# EAGLE board mhd_1 (EAGLE 5.10)
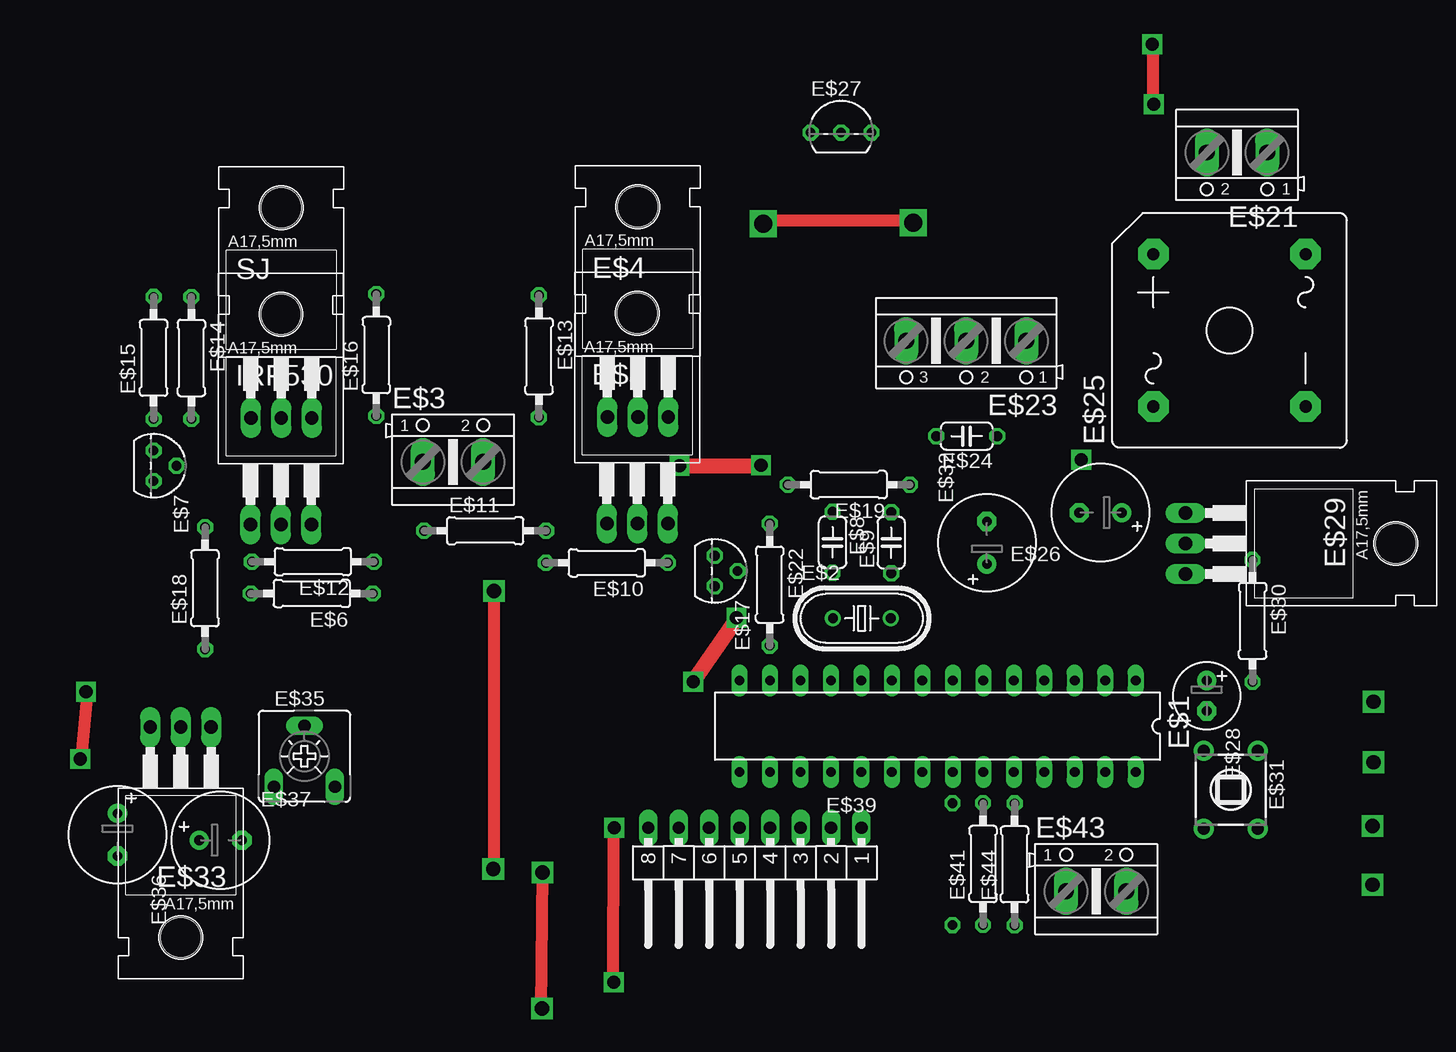
[diagram p0: board, top side]
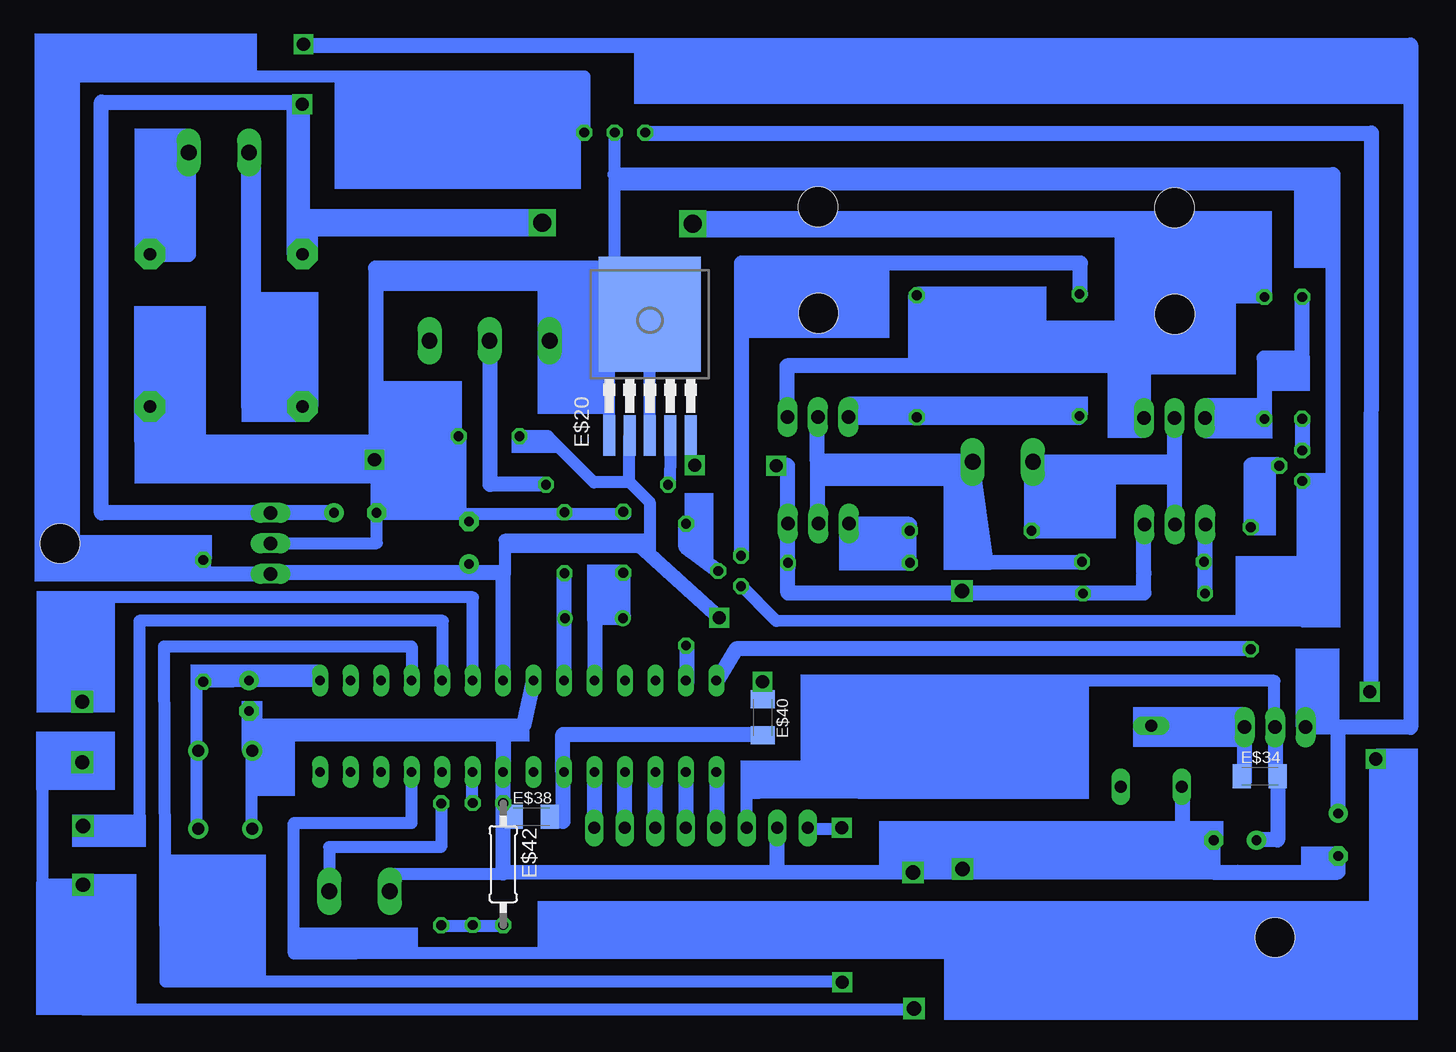
[diagram p1: board, bottom side, seen from below]

No outline drawn. Coordinates in mm, seen from the top.
Copper layers (1*16): Top 0.035mm / dielectric 1.5mm / Bottom 0.035mm
Design rules "default": minimum track width 10mil, minimum drill 24mil, track to track 8mil, track to pad 8mil, pad to pad 8mil, via to via 8mil, smd to smd 8mil, copper to edge 40mil, drill to drill 8mil, minimum pad ring 10mil, minimum via ring 8mil, stop-mask expansion 4mil, vias tented up to drill 0mil, thermal gap 10mil

## Footprints (pad centres in the part's own frame; a part is rotated, then mirrored left to right if it is on the bottom)
DIL28-3 = drill 0.813 long: 1 -16.51,-3.81; 2 -13.97,-3.81; 3 -11.43,-3.81; 4 -8.89,-3.81; 5 -6.35,-3.81; 6 -3.81,-3.81; 7 -1.27,-3.81; 8 1.27,-3.81; 9 3.81,-3.81; 10 6.35,-3.81; 11 8.89,-3.81; 12 11.43,-3.81; 13 13.97,-3.81; 14 16.51,-3.81; 15 16.51,3.81; 16 13.97,3.81; 17 11.43,3.81; 18 8.89,3.81; 19 6.35,3.81; 20 3.81,3.81; 21 1.27,3.81; 22 -1.27,3.81; 23 -3.81,3.81; 24 -6.35,3.81; 25 -8.89,3.81; 26 -11.43,3.81; 27 -13.97,3.81; 28 -16.51,3.81
HC49U70 = drill 0.813 round: 1 -2.413,0; 2 2.413,0
AK500/2 = drill 1.321 long: 1 -2.515,0; 2 2.515,0
TO220 = drill 1.118 long: 1 -2.54,-6.35; 2 0,-6.35; 3 2.54,-6.35 | hole 3.302: 0,11.176
0207/10 = drill 0.813 octagon: 1 -5.08,0; 2 5.08,0
TO92 = drill 0.813 octagon: 1 -1.27,0; 2 0,1.905; 3 1.27,0
C050-024X044 = drill 0.813 octagon: 1 -2.54,0; 2 2.54,0
TO263-51 = smd 1 x 3.4: 1 -3.4,-6.6; 2 -1.7,-6.6; 3 0,-6.6; 4 1.7,-6.6; 5 3.4,-6.6 | smd 8.5 x 9.6: 6 0,3.5
AK500/3 = drill 1.321 long: 1 -5.004,0; 2 0,0; 3 5.004,0
GBPC8 = drill 1.016 pad 2.54 octagon: + 6.35,6.35; - -6.35,-6.35; AC1 -6.35,6.35; AC2 6.35,-6.35
E3,5-8 = drill 0.813 pad 1.6 round: + -1.778,0 | drill 0.813 pad 1.6 octagon: - 1.778,0
TO92- = drill 0.813 octagon: 1 -2.54,0; 2 0,0; 3 2.54,0
E2,5-6 = drill 0.813 pad 1.6 round: + -1.27,0 | drill 0.813 pad 1.6 octagon: - 1.27,0
TL1105T = drill 1 pad 1.676 round: 1 -2.25,3.25; 2 2.25,3.25; 3 -2.25,-3.25; 4 2.25,-3.25
C1206K = smd 1.5 x 2: 1 -1.5,0; 2 1.5,0
CA6V = drill 1.016 long: A -2.54,-2.54; E 2.54,-2.54; S 0,2.54
MA08-1W = drill 1.016 long: 1 -8.89,0; 2 -6.35,0; 3 -3.81,0; 4 -1.27,0; 5 1.27,0; 6 3.81,0; 7 6.35,0; 8 8.89,0

## Placement (x,y rotation side)
E$1  [DIL28-3]  68.35,21.35 180 top
E$2  [HC49U70]  62.04,30.34 0 top
E$3  [AK500/2]  27.97,43.38 0 top
E$4  [TO220]  43.37,53.47 0 top
E$5  [TO220]  43.33,44.59 0 top
E$6  10k  [0207/10]  16.2,32.41 180 top
E$7  [TO92]  3.02,43.06 270 top
E$8  [C050-024X044]  59.6,36.68 270 top
E$9  [C050-024X044]  64.49,36.64 90 top
E$10  10k  [0207/10]  40.79,34.97 180 top
E$11  1k  [0207/10]  30.65,37.64 0 top
E$12  1k  [0207/10]  16.29,35.06 180 top
E$13  10k  [0207/10]  35.13,52.18 270 top
E$14  10k  [0207/10]  6.17,52.04 270 top
E$15  1k  [0207/10]  3.02,52.05 90 top
E$16  1k  [0207/10]  21.58,52.28 90 top
E$17  [TO92]  49.78,34.29 270 top
E$18  1k  [0207/10]  7.31,32.85 90 top
E$19  1k  [0207/10]  60.95,41.48 180 top
E$20  [TO263-51]  57.37,52.18 0 bottom
E$21  [AK500/2]  93.3,69.16 180 top
E$22  1k  [0207/10]  54.36,33.15 270 top
E$23  [AK500/3]  70.74,53.47 180 top
E$24  [C050-024X044]  70.78,45.52 180 top
E$25  [GBPC8]  92.68,54.34 90 top
E$26  [E3,5-8]  81.93,39.15 180 top
E$27  [TO92-]  60.31,70.82 0 top
E$28  [E2,5-6]  90.78,23.89 270 top
E$29  7805  [TO220]  95.36,36.58 270 top
E$30  10k  [0207/10]  94.6,30.13 270 top
E$31  [TL1105T]  92.78,16.06 180 top
E$32  [E3,5-8]  72.46,36.64 90 top
E$33  7805  [TO220]  5.28,14.92 180 top
E$34  [C1206K]  6.55,17.17 0 bottom
E$35  [CA6V]  15.59,18.85 0 top
E$36  [E3,5-8]  0.01,12.31 270 top
E$37  [E3,5-8]  8.61,11.85 0 top
E$38  [C1206K]  67.24,13.79 0 bottom
E$39  [MA08-1W]  53.12,12.88 180 top
E$40  [C1206K]  47.96,22.09 270 bottom
E$41  1k  [0207/10]  72.14,9.87 90 top
E$42  1k  [0207/10]  69.6,9.86 270 bottom
E$43  [AK500/2]  81.57,7.59 0 top
E$44  1k  [0207/10]  74.77,9.84 90 top
IRF530  [TO220]  13.63,44.51 0 top
SJ  [TO220]  13.66,53.38 0 top

## Library data of the parts
E$1 = atmel
E$2 = crystal
E$3 E$21 E$23 E$43 = con-ptr500
E$4 E$5 IRF530 SJ = ref-packages
E$6 E$10-E$16 E$18 E$19 E$22 E$29 E$30 E$33 E$41 E$42 E$44 = ref-packages-longpad
E$7 E$17 = linear
E$8 E$9 E$24 E$26 E$28 E$32 E$36 E$37 = rcl
E$20 = micro-siemens
E$25 = rectifier
E$27 = maxim
E$31 = switch
E$34 E$38 E$40 = resistor
E$35 = pot
E$39 = con-lstb

## Tracks (layer width: path | path; a pad name or v marks a point on that pad's centre or on a via)
S$1
  Bottom 1.27: 13.66,37.96 13.66,47
S$2
  Bottom 1.27: 43.42,43.42 43.42,47.12 | 30.49,43.42 43.42,43.42 | 43.42,43.42 43.42,37.93
S$3
  Bottom 1.27: 25.67,43.36 13.78,43.36 13.78,43.39
S$4
  Bottom 1.27: 16.23,38.15 16.21,38.15 16.21,34.14
S$5
  Bottom 1.27: 11.11,32.66 11.11,38.16
S$6
  Bottom 1.27: 45.88,34.62 45.88,38.13
S$7
  Bottom 1.27: 40.77,38.18 35.76,38.18 35.76,35.01
S$8
  Bottom 1.27: 16.21,34.06 16.21,32.44 45.89,32.44 45.89,35.05
S$9
  Bottom 1.27: 16.22,46.97 16.22,51.39 45.96,51.39 45.96,46.97
S$10
  Bottom 1.27: 25.54,37.63 25.55,43.17
S$11
  Bottom 1.27: 30.52,43.29 29.34,35.03 21.46,34.99
S$12
  Bottom 1.27: 3.05,46.99 3.02,46.99 3.02,44.39
S$13
  Bottom 1.27: 21.6,47.06 40.76,47.07
S$14
  Bottom 1.27: 11.07,47 6.19,47 6.19,52.02 3.03,52.02 3.03,57.19
S$15
  Bottom 1.27: 6.19,57.17 16.21,57.17 16.21,50.77
S$16
  Bottom 1.27: 35.21,57.3 35.21,51.54 35.3,51.54
S$17
  Bottom 1.27: 4.99,43.12 7.29,43.12 7.29,38.24
S$18
  Bottom 1.27: 21.5,57.39 21.5,59.94 49.76,59.94 49.76,35.65
S$19
  Bottom 1.27: 51.65,34.23 54.37,36.27 54.37,38.28
S$20
  Bottom 1.016: 3.03,41.73 3.03,30.1 46.83,30.12 49.83,33.17
S$21
  Bottom 1.27: 16.17,55.23 16.17,62.7 54.25,62.7
S$22  (via drill 1.1)
  Top 1.27: v46.85,43.05 53.62,43.04
S$23  (via drill 1.1)
  other vias: 53.64,43.11 80.32,43.56
S$24
  Bottom 1.016: 57.37,45.57 57.37,51.86 | 60.77,45.3 60.77,51.59
S$25
  Bottom 1.016: 55.69,41.43 55.66,44.3
S$26
  Bottom 1.27: 66.13,41.5 70.7,41.5 70.7,53.46
S$27
  Bottom 1.27: 65.76,53.43 59.22,53.43 59.22,53.41
S$28
  Bottom 1.016: 59.12,45.46 59.12,41.68 62.04,41.68 65.89,45.53 68.26,45.53
S$29  (via drill 1.5)
  other vias: 53.81,63.23
S$30  (via drill 1.5)
  other vias: 66.34,63.32
S$31
  Bottom 1.016: 60.31,70.85 60.34,70.85 60.34,58.19
S$32
  Bottom 1.27: 66.32,63.21 86.32,63.21 86.32,60.15
S$33
  Bottom 1.27: 86.28,47.91 90.79,47.91 90.79,70.3
S$34
  Bottom 1.27: 99.02,60.67 95.82,60.67 95.82,70.3
S$35
  Bottom 1.27: 60.23,59.52 80.23,59.52 80.23,43.48 99.08,43.48 99.08,47.91
S$36
  Bottom 1.27: 60.29,67.32 0.46,67.32 0.46,41.81 3.06,41.81
S$37
  Bottom 1.27: 54.32,28.04 54.32,24.95
S$38
  Bottom 1.27: 7.3,27.8 50.2,27.8 51.82,25.1
S$39
  Bottom 1.27: 59.61,30.39 61.96,30.39 61.96,25.23
S$40
  Bottom 1.27: 64.54,34.02 64.55,30.36 64.55,24.9
S$41
  Bottom 1.27: 59.58,30.51 59.61,34.08
S$42
  Bottom 1.016: 59.42,39.02 80.14,39.02 | 80.14,39.02 80.14,39.24 80.14,43.6 | 88.1,36.61 80.14,36.61 80.14,39.02
S$43
  Bottom 1.27: 45.91,38.17 45.91,43.09 46.88,43.09
S$44
  Bottom 1.27: 67.08,25.14 67.95,21.34 69.61,21.35 69.61,17.53
S$45
  Bottom 1.27: 83.65,39.14 103.09,39.14 103.09,73.35 86.35,73.35 86.35,63.25 78.52,63.25
S$46
  Bottom 1.016: 84.87,25.1 94.58,25.1
S$47
  Bottom 1.016: 90.82,22.62 90.82,21.51 69.24,21.51
S$48
  Bottom 1.27: 87.99,34.03 94.55,34.03 94.55,35.17
S$49
  Bottom 1.27: 69.59,25.03 69.59,34.12 89.19,34.12
S$50
  Bottom 1.016: 73.33,45.59 80.18,45.59
S$51
  Bottom 1.016: 59.19,41.8 57.41,40.02 57.41,36.87 69.48,36.87 69.48,33.99
S$52
  Bottom 1.016: 62.82,70.82 62.82,75.49 105.39,75.49 105.39,35.24 94.49,35.24
S$53  (via drill 1.1)
  other vias: 86.36,73.18
S$54  (via drill 1.1)
  other vias: 86.24,78.18
S$55
  Bottom 1.27: 86.34,78.1 -6.01,78.1 -6.01,21.25 0,21.25 | 0,14.07 0,21.25 | 0,21.25 2.76,21.25
S$56
  Bottom 1.27: 57.75,70.77 -2.74,70.77 -2.68,24.34
S$57
  Bottom 1.27: 5.25,21.36 5.25,16.84 5.22,16.84 | 7.84,21.3 7.84,16.78
S$58
  Bottom 1.27: 7.87,21.4 15.66,21.43
S$59
  Bottom 1.27: 13.02,16.57 13.02,11.79 10.33,11.79
S$60
  Bottom 1.27: 5.07,17.26 5.07,11.89 6.96,11.89
S$61
  Bottom 1.27: 10.47,11.86 10.47,9.2 0.03,9.2 0.03,10.5
S$62
  Bottom 1.27: 69.6,17.43 69.6,9.14 8.41,9.18
S$63
  Bottom 1.27: 64.62,17.53 64.62,13.42 65.68,13.42
S$64  (via drill 1.1)
  other vias: 51.59,30.38
S$65  (via drill 1.1)
  other vias: 48,25.06
S$66
  Top 1.27: 48,25.1 51.67,30.41
S$67
  Bottom 1.27: 51.59,30.41 58.66,36.76
S$68
  Bottom 1.27: 64.62,17.5 64.62,20.67 47.74,20.67
S$69
  Bottom 1.27: 62.02,17.54 62.02,12.72
S$70
  Bottom 1.27: 59.5,17.54 59.5,12.92 | 56.96,17.42 56.96,12.8 | 54.41,17.64 54.41,13.02 | 51.8,17.48 51.8,12.86
S$71
  Bottom 1.27: 46.81,12.86 46.81,9.3 46.84,9.3
S$72
  Bottom 1.016: 48.34,15.8 49.32,15.8 49.32,12.7
S$73  (via drill 1.1)
  other vias: -2.61,24.22
S$74  (via drill 1.1)
  other vias: -3.1,18.62
S$75
  Bottom 1.016: -3.08,18.6 -3.08,2.42 82.76,2.42
S$76
  Bottom 1.016: 72.22,17.65 72.22,14.86
S$77
  Bottom 1.016: 69.57,4.67 74.82,4.7
S$78
  Bottom 1.016: 74.77,14.96 74.77,11.27 84.1,11.27 84.1,7.66
S$79
  Bottom 1.016: 78.99,7 78.99,9.07 69.39,9.07
S$80
  Bottom 1.016: 95.13,12.7 95.13,25.08 92.15,25.08
S$81
  Bottom 1.016: 90.55,12.61 90.55,21.55 90.73,21.55
S$82
  Bottom 1.016: 77.23,17.66 77.23,13.3 87.04,13.3 87.04,2.43
S$83
  Bottom 1.016: 86.85,2.43 81.91,2.42
S$84  (via drill 1.1)
  other vias: 41.4,12.88
S$85  (via drill 1.1)
  other vias: 41.36,0.01
S$86
  Bottom 1.016: 44.3,12.82 41.27,12.82
S$87
  Bottom 1.016: 41.32,0.06 97.74,0.06 97.85,28 77.23,28 77.23,24.99
S$88
  Top 1.016: -2.52,24.19 -3.06,18.39
S$89
  Top 1.016: 41.33,12.87 41.29,-0.2
S$90
  Top 1.016: 86.29,78.3 86.29,72.96
S$91
  Top 1.016: 53.78,63.5 66.84,63.5
S$92  (via drill 1.2)
  other vias: 104.61,8.14
S$93  (via drill 1.2)
  other vias: 104.61,13.04
S$94  (via drill 1.2)
  other vias: 104.68,18.35
S$95  (via drill 1.2)
  other vias: 104.68,23.39
S$96
  Bottom 1.016: 74.62,25.02 74.62,30.13 99.92,30.13 99.92,13 104.7,13
S$97
  Bottom 1.016: 72.14,25.07 72.14,32.09 104.74,32.09 104.74,23.23
S$98
  Bottom 1.016: 104.67,18.31 108.02,18.31 108.02,8.17 104.5,8.17
S$99
  Bottom 1.016: 104.67,8.13 104.56,-2.24 35.33,-2.24
S$100  (via drill 1.2)
  Top 1.016: 35.33,-2.24 v35.44,9.17 35.44,9.19 35.56,9.19
  other vias: 31.38,32.63 31.32,9.45
S$101  (via drill 1.2)
  other vias: 35.38,-2.18
S$102
  Top 1.016: 31.35,32.35 31.36,9.35
S$103
  Bottom 1.016: 5.34,21.1 5.34,25.14 39.62,25.14 39.62,15.81 49.29,15.81
(copper drawn outside any net)
  shapes: Bottom area x82